# Altium PCB PCB1.PcbDoc
Units mm, origin at the board's own origin, x right, y up, seen from the top; angles counter-clockwise.
Board outline 100 x 75 mm, 2 copper layers (Top Layer, Bottom Layer); 43 components, 29 nets, 108 pads, 0 vias.
Unrouted connection lines stored in the file: 2.
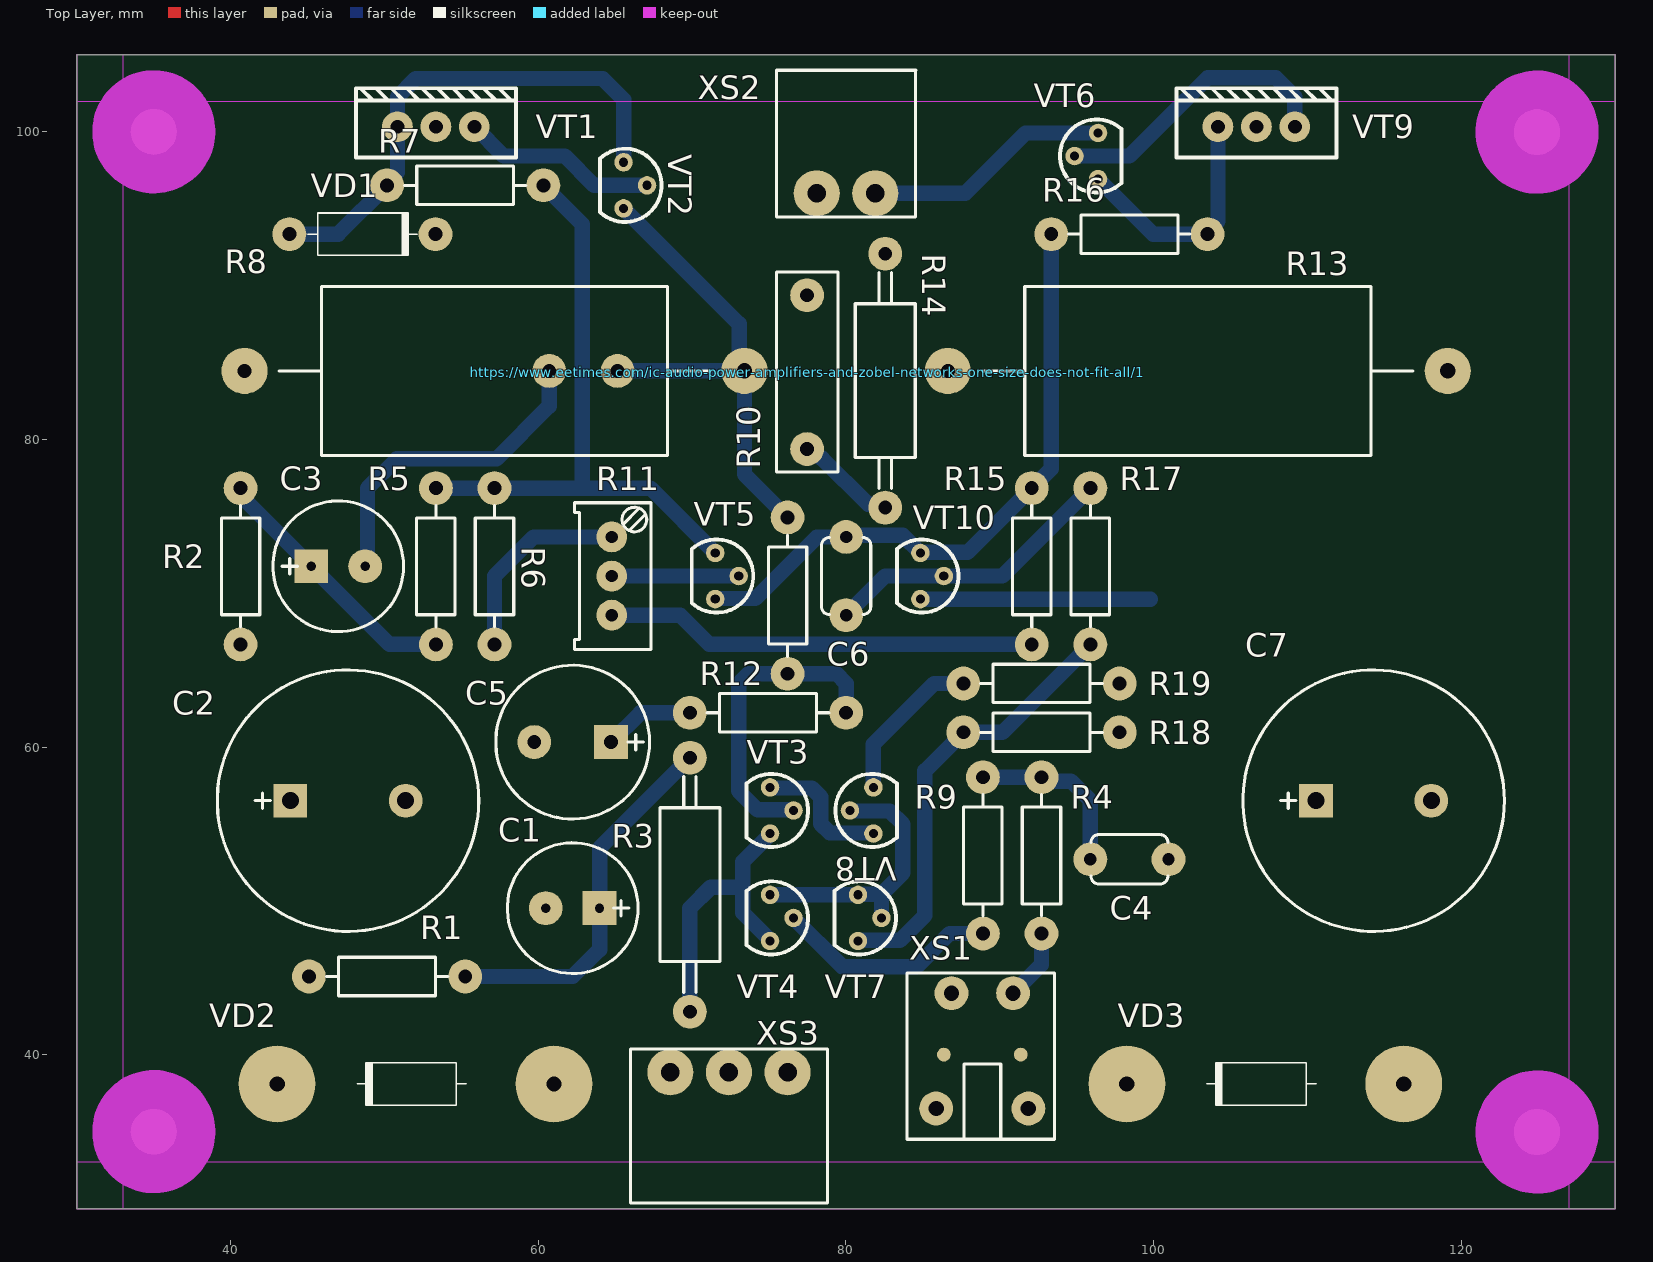
[diagram p0: Top Layer view]
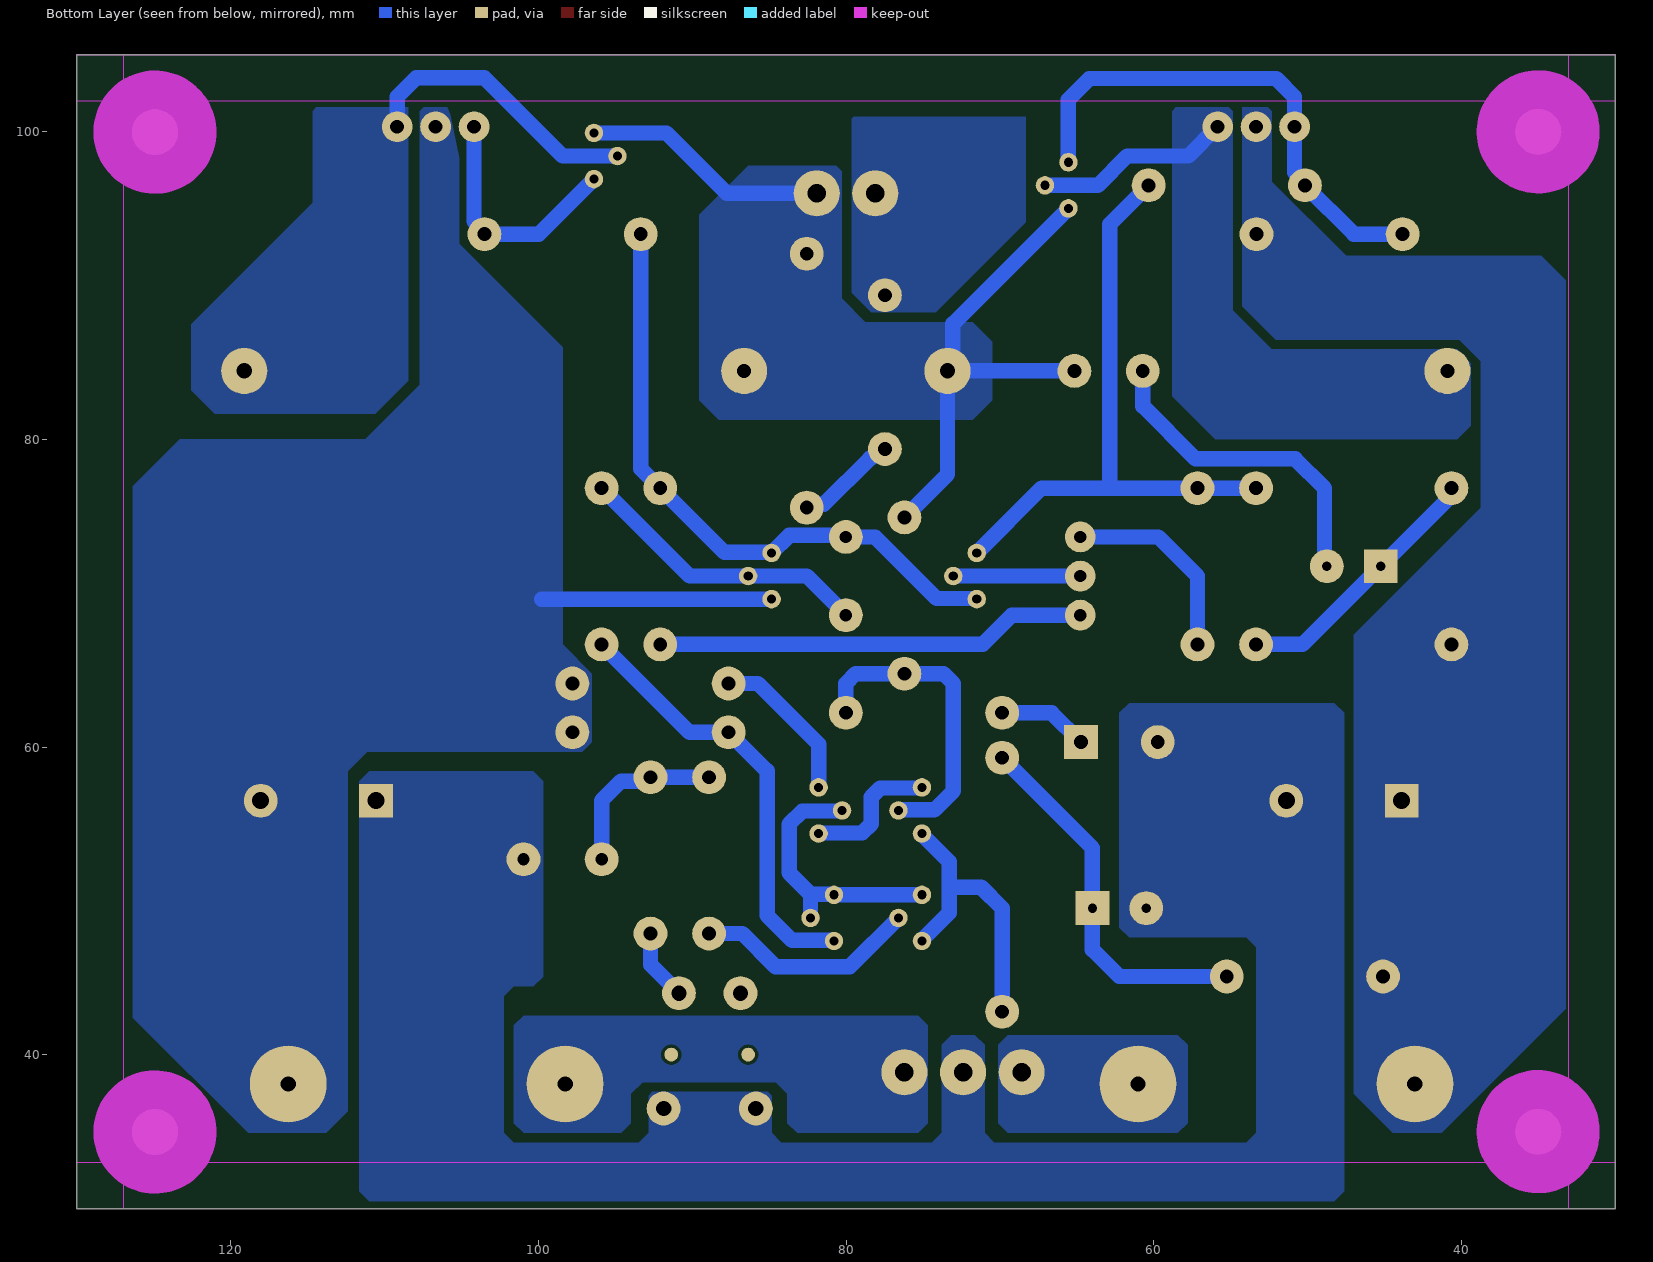
[diagram p1: Bottom Layer view, seen from below]
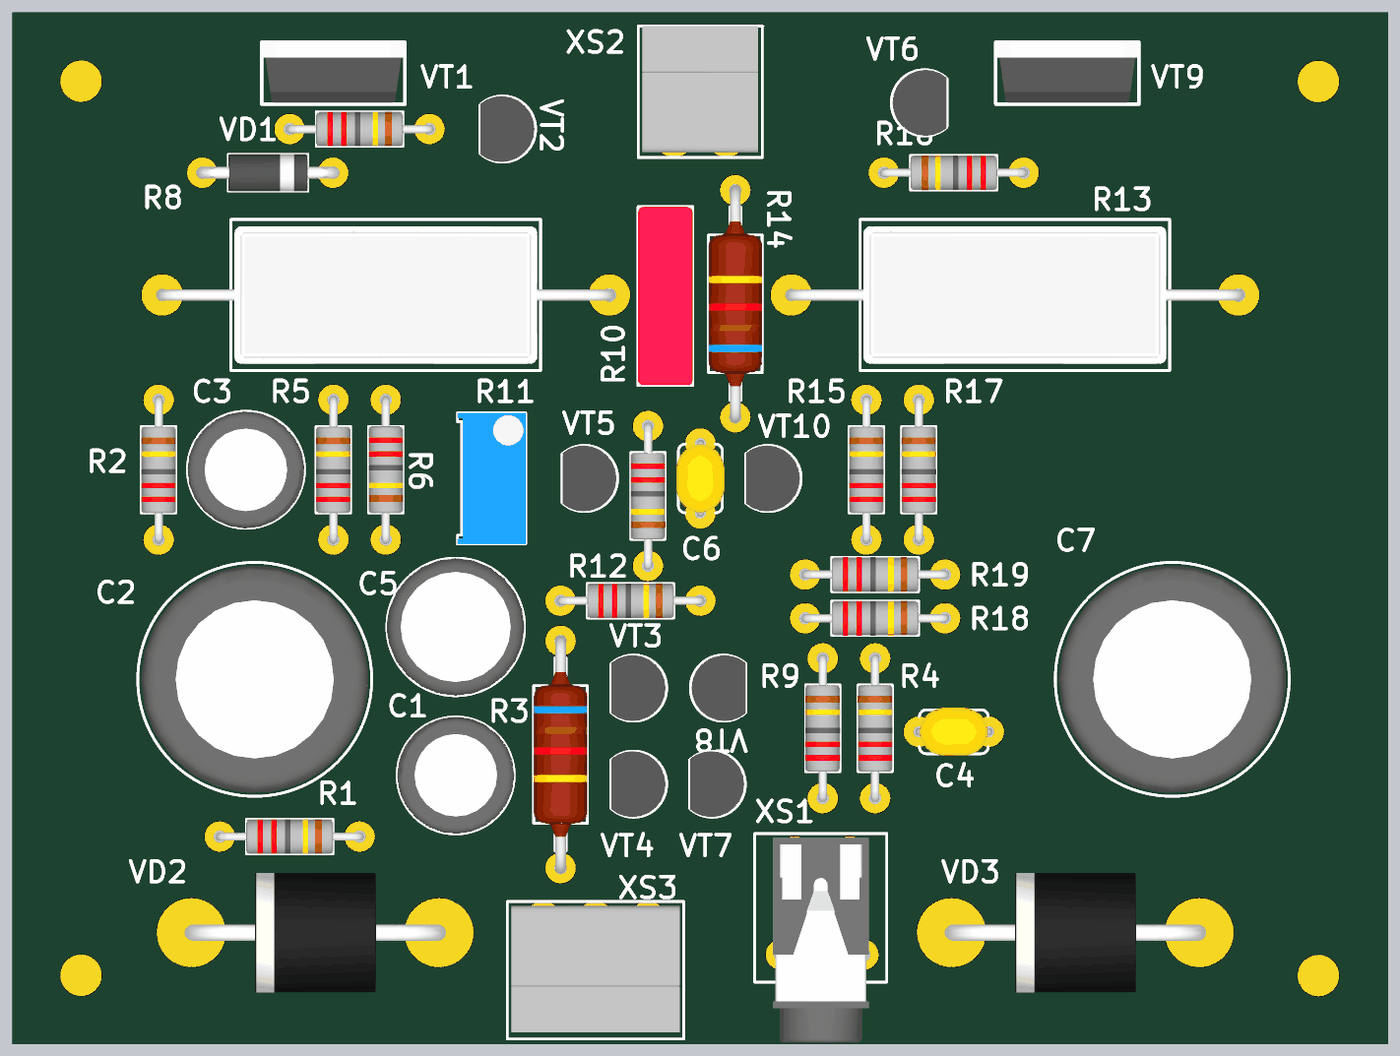
[diagram p2: 3D render of the assembled board from above, using the file's embedded part models]

## Layer stack, top to bottom
Top Solder: solder mask 0.0102, Solder Resist, Dk 3.5
Top Layer: signal copper 0.0356
Dielectric 1: dielectric 0.32, FR-4, Dk 4.8
Bottom Layer: signal copper 0.0356
Bottom Solder: solder mask 0.0102, Solder Resist, Dk 3.5

## Board outline
30,30 130,30 130,105 30,105

## Design rules (kind name [scope] priority, off if disabled: settings)
AcuteAngle [All] p1: minimum=3.50000000000000E+0001 checktracksonly=FALSE
BoardOutlineClearance "BoardOutlineClearance 1" [All] p1: gap=0.25 ignorepadtopadclearanceinfootprint=FALSE except(0: Arc-SplitContinuation Track-SplitContinuation SMDPad-SplitContinuation THPad-SplitContinuation Via-SplitContinuation Fill-SplitContinuation Poly-SplitContinuation Region-SplitContinuation Text-SplitContinuation) // Milling
Clearance "Clearance-1 1 Oz" [All] p1: gap=0.2 ignorepadtopadclearanceinfootprint=FALSE // Standart
ComponentClearance [All] p1: gap=0.1 collisioncheckmode=3 verticalgap=0.1 showdistances=FALSE
DiffPairsRouting "DiffPairsRouting 1 Oz" [All] p1: maxlimit=0.254 minlimit=0.2 mostfreqgap=0.254 toplayer_minwidth=0.2 toplayer_maxwidth=0.381 toplayer_prefwidth=0.381 bottomlayer_minwidth=0.2 bottomlayer_maxwidth=0.381 bottomlayer_prefwidth=0.381 maxuncoupledlength=12.7
Height [All] p1: minheight=0 maxheight=50 prefheight=12.7
HoleSize "Minimum HoleSize" [IsPad] p1: absolutevalues=TRUE maxlimit=5.9 minlimit=0.6 maxpercent=80.000 minpercent=20.000
HoleSize "Minimum HoleSize VIA 1" [IsVia] p2: absolutevalues=TRUE maxlimit=5.9 minlimit=0.3 maxpercent=80.000 minpercent=20.000 // Standart
HoleToHoleClearance Hole2HoleClearance [All] p1: gap=0.25 allowstackedmicrovias=FALSE
MinimumAnnularRing "Minimum AR VIA Standart" [All] p1: minimumring=0.15
MinimumAnnularRing "Minimum AR PAD Standart" [All] p2: minimumring=0.2
MinimumSolderMaskSliver "SolderMask Bridge Standart" [All] p1: minsoldermaskwidth=0.15 // All Masks
PlaneClearance "PlaneClearance 1 Oz" [All] p1: clearance=0.2
PlaneConnect "TermalConnect-1 1 Oz" [All] p1: planeconnectstyle=Relief reliefexpansion=0.2 reliefentries=4 reliefconductorwidth=0.2 reliefairgap=0.2 // Standart
PolygonConnect [All vs IsNamedPolygon('NONET_L-01_P-001')] p1: thpad.connectstyle=Direct thpad.reliefconductorwidth=0.254 thpad.reliefentries=4 thpad.polygonreliefangle="90 Angle" thpad.airgapwidth=0.254 smdpad.connectstyle=Relief smdpad.reliefconductorwidth=0.254 smdpad.reliefentries=4 smdpad.polygonreliefangle="90 Angle" smdpad.airgapwidth=0.254 via.connectstyle=Direct via.reliefconductorwidth=0.254 via.reliefentries=4 via.polygonreliefangle="90 Angle" via.airgapwidth=0.254
PolygonConnect "PolygonConnect-1 1 Oz" [All] p2: thpad.connectstyle=Relief thpad.reliefconductorwidth=0.2 thpad.reliefentries=4 thpad.polygonreliefangle="90 Angle" thpad.airgapwidth=0.2 smdpad.connectstyle=Relief smdpad.reliefconductorwidth=0.2 smdpad.reliefentries=4 smdpad.polygonreliefangle="90 Angle" smdpad.airgapwidth=0.2 via.connectstyle=Direct via.reliefconductorwidth=0.254 via.reliefentries=4 via.polygonreliefangle="90 Angle" via.airgapwidth=0.254 // Standart
RoutingCorners [All] p1 off: cornerstyle=45-Degree minsetback=2.54 maxsetback=2.54
RoutingVias [All] p1: holewidth=0.4 width=0.8 viastyle="Through Hole" minholewidth=0.3 minwidth=0.6 maxholewidth=5.9 maxwidth=8.9
SilkToSilkClearance Silk2SilkClearance [All] p1 off: silktosilkclearance=0.15
SilkToSolderMaskClearance Silk2SolderMaskClearance [IsPad] p1 off: minsilkscreentomaskgap=0.15 clearancetoexposedcopper=TRUE
SolderMaskExpansion SolderMaskExpansion-1 [All] p1: expansion=0.05 istentingtop=FALSE // Standart
UnRoutedNet [All] p1: checkbadconnections=TRUE
Width "Width 1 Oz" [All] p1: maxlimit=10 minlimit=0.2 preferedwidth=0.254 checkconnectedcopper=TRUE
18 further rules are at their usual default settings.

## Components (designator, comment, footprint, x,y, rotation, side; value= is the part's Value field where it differs from the comment)
C1 "2200uF 35V" CAPPR350-800X700 62.23,49.53 r180 top
C2 "2200uF 35V" CAPPR750-1600X3150 47.625,56.515 r0 top
C3 "2200uF 35V" CAPPR350-800X700 46.99,71.755 r0 top
C4 "Cap Ceramic 100pF" CAPRR508-350X500X500 98.425,52.705 r0 top
C5 "100uF 100V" CAPPR500-1000X2050 62.23,60.325 r180 top
C6 "Cap Ceramic 100pF" CAPRR508-350X500X500 80.01,71.12 r90 top
C7 "2200uF 35V" CAPPR750-1600X3150 114.3,56.515 r0 top
https://www.eetimes.com/ic-audio-power-amplifiers-and-zobel-networks-one-size-does-not-fit-all/1 "2200uF 35V" CAPR1000-400X1300X950 77.47,84.375 r90 top
R1 "Resistor 0.25W" RES1016-630X250 50.165,45.085 r180 top
R2 "Resistor 0.25W" RES1016-630X250 40.64,71.755 r270 top
R3 "Resistor 1W" RES1651-1000X390 69.85,51.054 r270 top
R4 "Resistor 0.25W" RES1016-630X250 92.71,52.959 r270 top
R5 "Resistor 0.25W" RES1016-630X250 53.34,71.755 r270 top
R6 "Resistor 0.25W" RES1016-630X250 57.15,71.755 r90 top
R7 "Resistor 0.25W" RES1016-630X250 55.245,96.52 r180 top
R8 "Resistor 5W" RES_5W 57.15,84.455 r180 top
R9 "Resistor 0.25W" RES1016-630X250 88.9,52.959 r270 top
R10 "Resistor 0.25W" RES1016-630X250 76.2,69.85 r90 top
R11 "Resistor film, =Value, , 3296W, 0.5W, -55...+125°C" TRIM_BOURNS_3296W 64.77,71.12 r270 top
R12 "Resistor 0.25W" RES1016-630X250 74.93,62.23 r180 top
R13 "Resistor 5W" RES_5W 102.87,84.455 r180 top
R14 "Resistor 1W" RES1651-1000X390 82.55,83.82 r90 top
R15 "Resistor 0.25W" RES1016-630X250 92.075,71.755 r270 top
R16 "Resistor 0.25W" RES1016-630X250 98.425,93.345 r0 top
R17 "Resistor 0.25W" RES1016-630X250 95.885,71.755 r270 top
R18 "Resistor 0.25W" RES1016-630X250 92.71,60.96 r180 top
R19 "Resistor 0.25W" RES1016-630X250 92.71,64.135 r180 top
VD1 "Diode 1N4002" DO-41 43.815,93.345 r0 top
VD2 "Diode 15SQ045" R6 56.515,38.1 r180 top
VD3 "Diode 15SQ045" R6 111.76,38.1 r180 top
VT1 "" TO-220AB 53.34,100.33 r0 top
VT2 "BC546C" TO-92-A 66.04,96.52 r90 top
VT3 "BC556B" TO-92-A 75.565,55.88 r90 top
VT4 "BC556B" TO-92-A 75.565,48.895 r90 top
VT5 "Transistor NPN BC546C" TO-92-A 72,71.12 r90 top
VT6 "BC556B" TO-92-A 95.885,98.425 r270 top
VT7 "BC546C" TO-92-A 81.28,48.895 r90 top
VT8 "BC546C" TO-92-A 81.28,55.88 r270 top
VT9 "IRF9510PBF" TO-220AB 106.68,100.33 r0 top
VT10 "" TO-92-A 85.335,71.12 r90 top
XS1 "Audio Connector 3 pin" ST-025 85.46,35.905 r0 top
XS2 "Connector Dynamic 2 pin" 15EDGRC-3.81-02P 80,96 r180 top
XS3 "Connector Power 3 pin" 15EDGRC-3.81-03P 72.39,38.862 r0 top

## Footprints (in the part's own frame and the unit in brackets; to place one, negate y for a bottom-side part, rotate by r counter-clockwise, add the part's x,y. Pads: shape width x height; smd on the part's side, far side on the other; paste and mask are expansions set on the pad)
15EDGRC-3.81-02P [mm] "PCB Header, 8A, 160 V, Pitch: 3.81mm, 2 Positions, MCV Serie"
  round 3 hole 1.2: 1(-1.905,0) 2(1.905,0)
  silkscreen extent -4.56,-8 4.51,1.55, body extent -4.21,-8 4.21,1.2, height 7.29
15EDGRC-3.81-03P [mm] "PCB Header, 8A, 160 V, Pitch: 3.81mm, 3 Positions, MCV Serie"
  round 3 hole 1.2: 1(-3.81,0) 2(0,0) 3(3.81,0)
  silkscreen extent -6.41,-8.5 6.41,1.5, body extent -6.11,-8 6.11,1.2, height 7.29
CAPPR350-800X700 [mm] "Capacitor, Radial, Pin spacing 3.5mm - Body Diameter 8mm X Body Height 7mm"
  rect 2.2x2.2 hole 0.6: 1(-1.75,0)
  round 2.2 hole 0.6: 2(1.75,0)
  silkscreen extent -4.25,-4.25 4.25,4.25, body extent -4.26,-4.26 4.24,4.23, height 7
CAPPR500-1000X2050 [mm] "Capacitor, Radial, Pin spacing 5.0mm - Body Diameter 10mm X Body Height 20.5mm"
  rect 2.2x2.2 hole 0.9: 1(-2.5,0)
  round 2.2 hole 0.9: 2(2.5,0)
  silkscreen extent -5,-5 5,5, body extent -5,-5 5,5, height 20.5
CAPPR750-1600X3150 [mm] "Capacitor, Radial, Pin spacing 7.5mm - Body Diameter 16mm X Body  Height 31.5mm"
  rect 2.2x2.2 hole 1.1: 1(-3.75,0)
  round 2.2 hole 1.1: 2(3.75,0)
  silkscreen extent -8.5,-8.5 8.5,8.5, body extent -8.25,-8.24 8.25,8.24, height 27
CAPR1000-400X1300X950 [mm] "Capacitor Radial, Pin spacing 10mm - Body With 4mm X Body Length 13mm X Body Height 9.5mm"
  round 2.2 hole 0.9: 1(-5,0) 2(5,0)
  silkscreen extent -6.5,-2 6.5,2, body extent -6.5,-2 6.5,2, height 9.5
CAPRR508-350X500X500 [mm] "Capacitor Radial Rounded, Pin spacing 5.08mm - Body With 3.2mm X Body Length 5.0mm X Body Height 5.0mm"
  round 2.2 hole 0.8: 1(-2.54,0) 2(2.54,0)
  silkscreen extent -2.5,-1.6 2.5,1.6, body extent -2.79,-1.75 2.79,1.75, height 5
DO-41 [mm]
  round 2.2 hole 0.9: 1(0,0) 2(9.5,0)
  silkscreen extent 1.2,-1.38 8.3,1.38, body extent -0.39,-1.35 9.99,1.35, height 2.83
R6 [mm]
  round 5 hole 1: 1(-4.5,0) 2(13.5,0)
  silkscreen extent 1.2,-1.38 8.3,1.38, body extent -5,-4.35 13.96,4.35, height 9.35
RES1016-630X250 [mm] "Resistor, Axial, Pad spacing 10.16 mm - Body Lengh 6.3mm X Body Diameter 2.5mm"
  round 2.2 hole 0.9: 1(-5.08,0) 2(5.08,0)
  silkscreen extent -3.95,-1.25 3.95,1.25, body extent -5.38,-1.27 5.38,1.26, height 2.51
RES1651-1000X390 [mm] "Resistor, Axial, Pad spacing 16.51mm - Body Lengh 10mm X Body Diameter 3.9mm"
  round 2.2 hole 0.9: 1(-8.255,0) 2(8.255,0)
  silkscreen extent -7.02,-1.95 7.02,1.95, body extent -8.64,-1.95 8.65,1.95, height 3.9
RES_5W [mm] "Resistor, Axial, Pad spacing 10.16 mm - Body Lengh 6.3mm X Body Diameter 2.5mm"
  round 3 hole 1: 1(-16.25,0)
  round 3 hole 0.9: 2(16.25,0)
  silkscreen extent -14,-5.5 14,5.5, body extent -16.65,-5 16.65,5, height 9
ST-025 [mm]
  round 2.2 hole 1: 1(0.4,0.6) 1(6.4,0.6) 2(1.4,8.1) 3(5.4,8.1)
  round 0.9 all layers, no hole: 2(0.9,4.1) 2(5.9,4.1)
  silkscreen extent -1.5,-1.4 8.1,9.4, body extent -0.44,-5.8 7.04,9.1, height 6
TO-92-A [mm]
  round 1.2 hole 0.6: 1(1.5,0.5) 2(0,-1.025) 3(-1.5,0.5)
  silkscreen extent -2.38,-1.97 2.38,2.02, body extent -2.4,-1.92 2.4,2.01, height 10
TO-220AB [mm] "КТ-28-2"
  round 2 hole 0.9: 1(-2.5,0) 2(0,0) 3(2.5,0)
  silkscreen extent -5.2,-2 5.2,2.5, body extent -5.1,-1.9 5.1,2.6, height 26.06
TRIM_BOURNS_3296W [mm] "Trimming Potentiometer BOURNS 3296W Series"
  round 2 hole 0.8: 1(-2.54,0) 2(0,0) 3(2.54,0)
  silkscreen extent -4.76,-2.41 4.76,2.54, body extent -4.76,-2.41 4.77,2.55, height 11.55

## Part data
C1 C3: library part "Cap Polarity 47uF 50V", Type=Конденсатор
C2 C7: library part "Cap Polarity 2200uF 35V", Type=Конденсатор
C5: library part "Cap Polarity 100uF 100V", Type=Конденсатор
https://www.eetimes.com/ic-audio-power-amplifiers-and-zobel-networks-one-size-does-not-fit-all/1: library part "Cap Film 0.68uF 250V", Type=Конденсатор
R11: library part "Resistor Trimmer 1K", Manufacturer=Bourns, Package=3296W, PartNumber=3296W-1-103LF, Power=0.5W, Temperature=-55...+125°C, TypeResistor="Resistor film", ValueManufacturerPartNumber="Resistor film, =Value, , 3296W, 0.5W, -55...+125°C", HelpURL=https://www.digikey.com/product-detail/en/bourns-inc/3296W-1-103LF/3296W-103LF-ND/1088045
VT1: library part IRF510PBF
VT10: library part "Transistor N-Mosfet BS170"
C4 C6: Type=Конденсатор
R1 R2 R3 R4 R5 R6 R7 R8 R9 R10 R12 R13 R14 R15 R16 R17 R18 R19: Type=Резистор
VD1 VD2 VD3: Published=18.05.2010, Publisher="Andrew Danich", Type=Диод

## Free pads (board coordinates)
  round 2.2 hole 0.9: 3(60.706,84.455) 3(65.151,84.455)
  round 3 all layers, no hole: A(35,35) A(35,100) A(124.922,34.979) A(124.922,99.979)

## Nets (pads, with @x,y where several pads share a name; then routed paths per layer and width w, separated by ;. In a path a pad name is that pad's centre, name@x,y a point inside that pad or via, vN(x,y) a via of type N, cw(c..) or ccw(c..) an arc to the next point about the centre after c; other vN are vias at no path point)
GND: C1.2 C2.2 C4.2 C5.2 C7.1 https://www.eetimes.com/ic-audio-power-amplifiers-and-zobel-networks-one-size-does-not-fit-all/1.2 XS1.1 XS2.2 XS3.2
NetC1_1: C1.1 R1.1 R3.1 | length 24.4
  Bottom Layer w1: R1.1 62.23,45.085 63.98,46.835 C1.1 63.98,53.439 R3.1
NetC2_1: C2.1 R1.2 R2.2 VD1.2 VD2.2 VT1.2
NetC3_1: C3.1 R2.1 R5.2 | length 17.2
  Bottom Layer w1: R2.1 40.755,76.72 40.755,76.24 C3.1 50.32,66.675 R5.2
NetC3_2: C3.2 pad.3 R8.1 R10.2 R13.2 R14.2 VT2.3 VT6.3 XS2.1 | length 70.3
  Bottom Layer w1: C3.2 48.895,71.91 48.895,76.835 50.8,78.74 57.277,78.74 60.706,82.169 pad.3@60.706,84.455 ; pad.3@65.151,84.455 R8.1 ; VT2.3 73.051,87.509 73.051,84.804 R8.1 ; R10.2 73.4,77.73 R8.1 ; XS2.1 87.745,96 91.67,99.925 VT6.3
NetC4_1: C4.1 R4.1 R9.1 | length 11.3
  Bottom Layer w1: R9.1 R4.1 ; R4.1@92.71,57.785 94.615,57.785 95.885,56.515 C4.1
NetC5_1: C5.1 R12.2 | length 5.9
  Bottom Layer w1: C5.1 66.635,62.23 R12.2
NetC6_1: C6.1 R17.1 VT10.2 | length 20.1
  Bottom Layer w1: C6.1@79.622,68.192 82.55,71.12 85.48,71.12 VT10.2 90.17,71.12 R17.1@96.081,77.031
NetC6_2: C6.2 R15.1 R16.1 VT5.3 VT10.1 | length 41.5
  Bottom Layer w1: VT5.3@71.5,69.658 74.103,69.658 78.105,73.66 C6.2 80.121,73.771 81.798,73.771 81.804,73.765 83.69,73.765 VT10.1 ; VT10.1@84.835,72.658 87.898,72.658 93.345,78.105 R16.1
NetC7_2: C7.2 R18.1 R19.1 VD3.1 VT9.2 VT10.3 | length 15
  Bottom Layer w1: VT10.3 99.798,69.62
Nethttps://www.eetimes.com/ic-audio-power-amplifiers-and-zobel-networks-one-size-does-not-fit-all/1_1: https://www.eetimes.com/ic-audio-power-amplifiers-and-zobel-networks-one-size-does-not-fit-all/1.1 R14.1 | length 6.7
  Bottom Layer w1: https://www.eetimes.com/ic-audio-power-amplifiers-and-zobel-networks-one-size-does-not-fit-all/1.1 77.795,79.375 78.395,78.775 78.451,78.775 81.431,75.795 82.32,75.795 R14.1
NetR3_2: R3.2 VT3.3 VT4.3 | length 19.2
  Bottom Layer w1: R3.2 69.85,49.53 71.208,50.888 73.279,50.888 ; VT4.3 75.065,47.449 73.279,49.235 73.279,50.888 ; VT3.3 75.065,54.326 73.279,52.54 73.279,50.888
NetR4_2: R4.2 XS1.3 | length 4.4
  Bottom Layer w1: XS1.3 92.71,45.855 R4.2@92.71,47.625
NetR5_1: R5.1 R6.2 R7.1 VT5.1 | length 40.6
  Bottom Layer w1: R5.1 R6.2 62.865,76.835 ; R7.1 62.865,93.98 62.865,76.835 ; VT5.1 67.285,76.835 62.865,76.835
NetR6_1: R6.1 R11.1 | length 13.1
  Bottom Layer w1: R6.1 57.15,71.12 59.69,73.66 R11.1@64.796,73.66
NetR7_2: R7.2 VD1.1 VT1.1 VT2.1 | length 33.5
  Bottom Layer w1: VD1.1 46.99,93.345 R7.2 50.165,96.682 50.84,97.357 50.84,102.275 52.03,103.465 64.175,103.465 65.54,102.1 VT2.1
NetR8_2: R8.2 VT1.3 VT2.2 | length 12.8
  Bottom Layer w1: VT1.3 57.745,98.425 61.722,98.425 63.627,96.52 VT2.2
NetR9_2: R9.2 VT4.2 | length 14.5
  Bottom Layer w1: VT4.2 79.765,45.72 84.582,45.72 86.741,47.879 R9.2
NetR10_1: R10.1 R12.1 VT3.2 | length 20.5
  Bottom Layer w1: VT3.2 76.552,55.918 74.257,55.918 73.025,57.15 73.025,64.135 73.66,64.77 R10.1 79.375,64.77 80.01,64.135 R12.1
NetR11_2: R11.2 VT5.2 | length 8.3
  Bottom Layer w1: R11.2 VT5.2
NetR11_3: R11.3 R15.2 | length 28.2
  Bottom Layer w1: R11.3@64.631,68.58 R11.3 69.215,68.58 71.12,66.675 R15.2
NetR13_1: R13.1 VT6.2 VT9.3 | length 18.9
  Bottom Layer w1: VT6.2 98.425,98.425 103.505,103.505 107.95,103.505 109.18,102.275 VT9.3
NetR16_2: R16.2 VT6.1 VT9.1 | length 15.9
  Bottom Layer w1: VT6.1 99.965,93.345 R16.2 103.505,93.507 104.18,94.182 VT9.1
NetR17_2: R17.2 R18.2 VT7.3 | length 28.6
  Bottom Layer w1: VT7.3 80.818,47.433 83.501,47.433 85.122,49.054 85.122,58.452 R18.2 90.17,60.96 R17.2
NetR19_2: R19.2 VT8.3 | length 10.3
  Bottom Layer w1: VT8.3 81.78,60.19 85.725,64.135 R19.2
NetVD2_1: VD2.1 XS3.1
NetVD3_2: VD3.2 XS3.3
NetVT3_1: VT3.1 VT8.1 | length 9
  Bottom Layer w1: VT3.1 75.103,57.342 77.773,57.342 78.359,56.756 78.359,55.004 78.945,54.418 81.742,54.418 VT8.1
NetVT4_1: VT4.1 VT7.1 VT7.2 VT8.2 | length 17.7
  Bottom Layer w1: VT4.1 VT7.1 80.818,50.433 82.296,50.433 ; VT8.2 80.293,55.842 82.842,55.842 83.693,54.991 83.693,51.83 82.296,50.433 ; VT7.2 82.305,50.424 82.296,50.433
pads on no net: XS1.2

## Polygon pours and split planes (outlines as drawn)
GND on Bottom Layer "NONET_L-01_P-001" (solid, remove dead copper, pour order 10): 79.629,89.535 78.359,88.265 74.168,88.265 68.326,94.107 68.326,100.965 79.502,100.965 79.629,100.838
NetVD3_2 on Bottom Layer "NONET_L-01_P-001" (solid, remove dead copper, pour order 6): 75.311,34.925 83.185,34.925 83.82,35.56 83.82,37.465 84.582,38.227 93.218,38.227 93.98,37.465 93.98,35.56 94.615,34.925 100.965,34.925 101.6,35.56 101.6,41.91 100.965,42.545 75.311,42.545 74.676,41.91 74.676,35.56
NetC7_2 on Bottom Layer "NONET_L-01_P-001" (solid, remove dead copper, pour order 9): 113.792,34.925 118.872,34.925 126.365,42.418 126.365,76.962 123.317,80.01 111.252,80.01 107.696,83.566 107.696,101.346 107.442,101.6 105.918,101.6 105.718,101.118 105.156,98.291 105.156,92.71 98.425,85.979 98.425,66.675 96.52,64.77 96.52,60.325 97.155,59.69 111.125,59.69 112.395,58.42 112.395,36.322
GND on Bottom Layer "NONET_L-01_P-001" (solid, remove dead copper, pour order 8): 73.787,40.64 73.787,34.925 74.422,34.29 84.201,34.29 84.836,34.925 84.836,37.338 85.09,37.592 92.583,37.592 92.837,37.338 92.837,34.925 93.472,34.29 101.6,34.29 102.235,34.925 102.235,43.815 101.6,44.45 100.33,44.45 99.695,45.085 99.695,57.785 100.33,58.42 110.998,58.42 111.633,57.785 111.633,31.115 110.998,30.48 48.26,30.48 47.625,31.115 47.625,62.23 48.26,62.865 61.595,62.865 62.23,62.23 62.23,48.26 61.595,47.625 53.975,47.625 53.34,46.99 53.34,34.925 53.975,34.29 70.358,34.29 70.993,34.925 70.993,40.64 71.628,41.275 73.152,41.275
NetR13_1 on Bottom Layer "NONET_L-01_P-001" (solid, remove dead copper, pour order 3): 108.458,101.6 108.458,83.82 110.617,81.661 121.031,81.661 122.555,83.185 122.555,87.503 114.681,95.377 114.681,101.346 114.427,101.6
NetC3_2 on Bottom Layer "NONET_L-01_P-001" (solid, remove dead copper, pour order 0): 80.289,97.434 80.289,89.179 78.74,87.63 71.755,87.63 70.485,86.36 70.485,82.55 71.755,81.28 88.265,81.28 89.535,82.55 89.535,94.615 86.36,97.79 80.645,97.79
NetVD2_1 on Bottom Layer "NONET_L-01_P-001" (solid, remove dead copper, pour order 5): 57.785,40.64 57.785,35.56 58.42,34.925 69.469,34.925 70.104,35.56 70.104,40.64 69.469,41.275 58.42,41.275
NetR8_2 on Bottom Layer "NONET_L-01_P-001" (solid, remove dead copper, pour order 2): 54.864,101.346 54.864,88.392 52.324,85.852 40.259,85.852 39.37,84.963 39.37,80.899 40.259,80.01 56.007,80.01 58.801,82.804 58.801,101.346 58.547,101.6 55.118,101.6
NetC2_1 on Bottom Layer "NONET_L-01_P-001" (solid, remove dead copper, pour order 1): 54.229,101.6 54.229,88.646 52.07,86.487 40.132,86.487 38.735,85.09 38.735,75.565 46.99,67.31 46.99,37.465 44.45,34.925 41.275,34.925 33.02,43.18 33.02,90.17 34.798,91.948 47.491,91.948 52.324,96.765 52.324,101.346 52.578,101.6

## Keep-outs
Keep-Out Layer:
  circle w4: c35,35 r2
  circle w4: c35,100 r2
  circle w4: c124.922,34.979 r2
  circle w4: c124.922,99.979 r2
  rectangle: 30,30 130,33
  rectangle: 30,102 130,105
  rectangle: 127,30 130,105
  rectangle: 30,30 33,105

## Silkscreen, mask and mechanical layers (free items; w line width, h text height)
Mechanical 1:
  the board outline again, w0.1